# EAGLE board 549-teletouch (EAGLE 8.0.0)
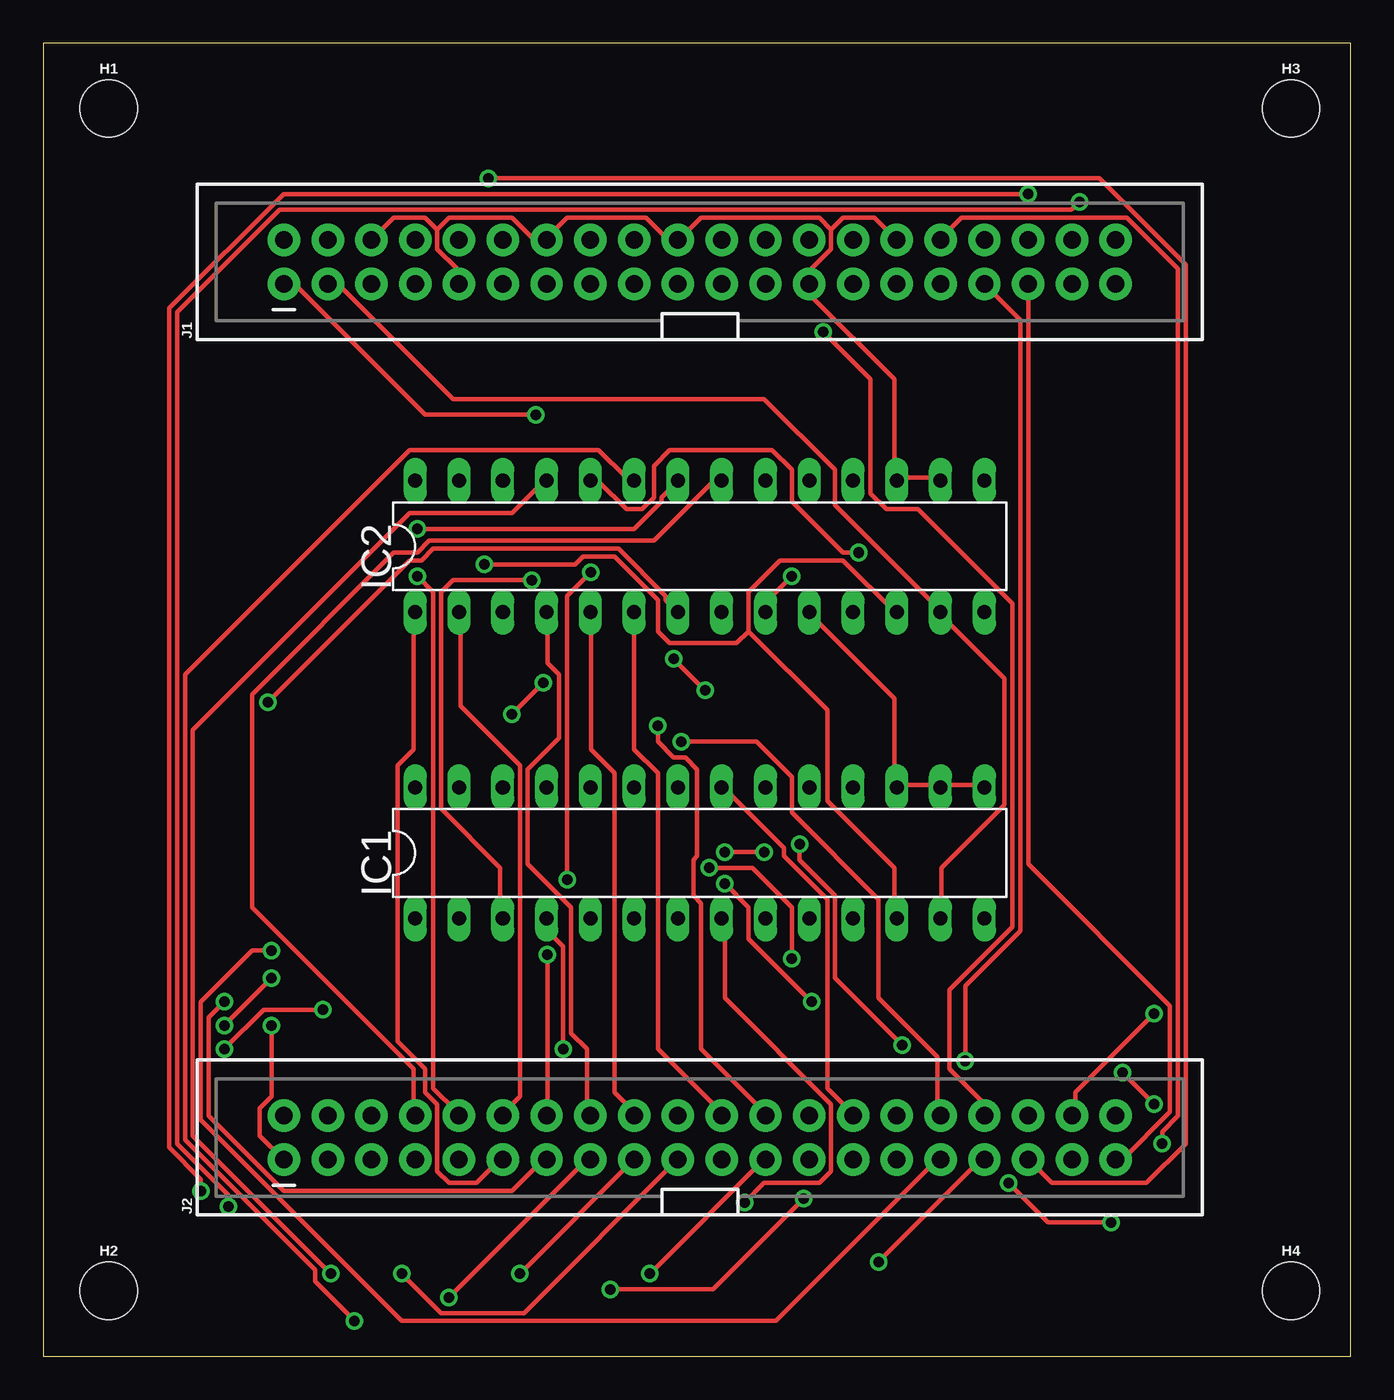
[diagram p0: board, top side]
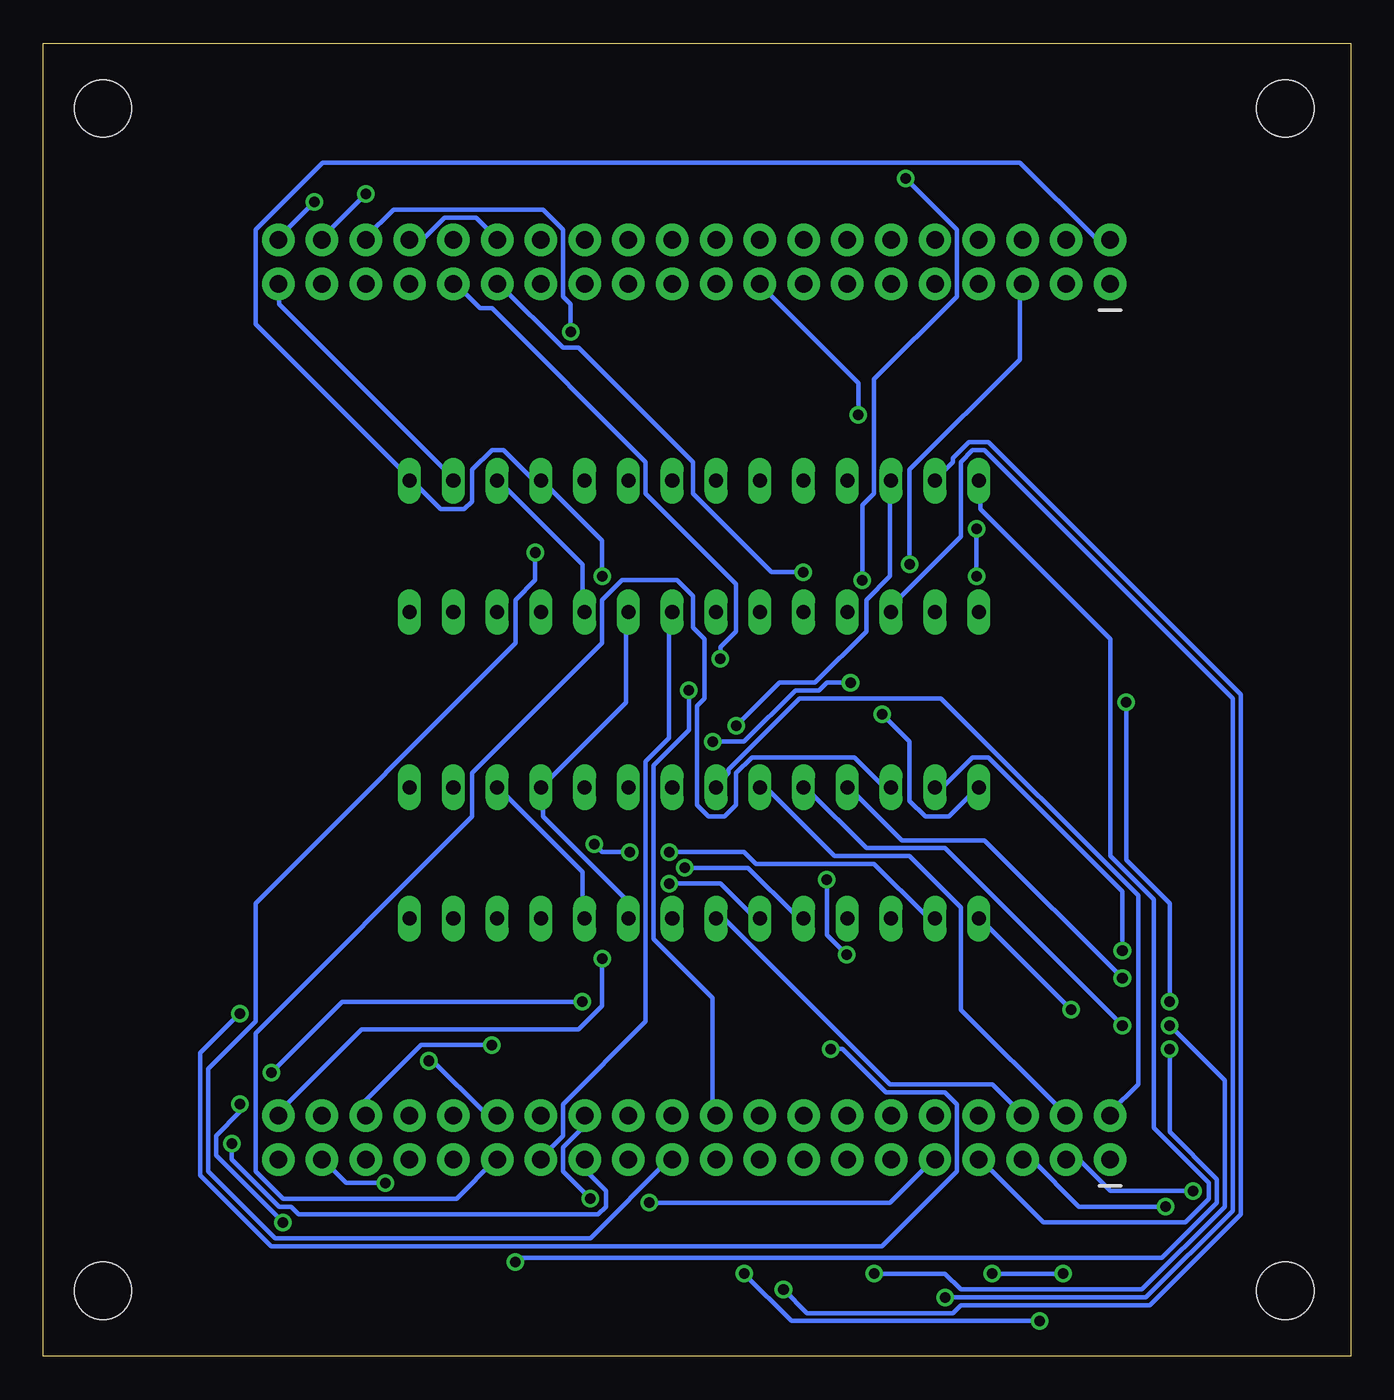
[diagram p1: board, bottom side, seen from below]

Size 75.87 x 76.19 mm. Coordinates in mm from the lower left corner, seen from the top.
Outline: 0,0 75.87,0 75.87,76.19 0,76.19 0,0
Copper layers (1*16): Top 0.035mm / dielectric 1.5mm / Bottom 0.035mm
Design rules "default": minimum track width 10mil, minimum drill 24mil, track to track 8mil, track to pad 8mil, pad to pad 8mil, via to via 8mil, smd to smd 8mil, copper to edge 40mil, drill to drill 8mil, minimum pad ring 10mil, minimum via ring 8mil, stop-mask expansion 4mil, vias tented up to drill 0mil, thermal gap 10mil

## Footprints (pad centres in the part's own frame; a part is rotated, then mirrored left to right if it is on the bottom)
STAND-OFF = hole 3.302: 0,0
DIL28-3 = drill 0.813 long: 1 -16.51,-3.81; 2 -13.97,-3.81; 3 -11.43,-3.81; 4 -8.89,-3.81; 5 -6.35,-3.81; 6 -3.81,-3.81; 7 -1.27,-3.81; 8 1.27,-3.81; 9 3.81,-3.81; 10 6.35,-3.81; 11 8.89,-3.81; 12 11.43,-3.81; 13 13.97,-3.81; 14 16.51,-3.81; 15 16.51,3.81; 16 13.97,3.81; 17 11.43,3.81; 18 8.89,3.81; 19 6.35,3.81; 20 3.81,3.81; 21 1.27,3.81; 22 -1.27,3.81; 23 -3.81,3.81; 24 -6.35,3.81; 25 -8.89,3.81; 26 -11.43,3.81; 27 -13.97,3.81; 28 -16.51,3.81
2X20_SHROUDED = drill 1.016 pad 1.88: 1 -1.27,24.13; 2 1.27,24.13; 3 -1.27,21.59; 4 1.27,21.59; 5 -1.27,19.05; 6 1.27,19.05; 7 -1.27,16.51; 8 1.27,16.51; 9 -1.27,13.97; 10 1.27,13.97; 11 -1.27,11.43; 12 1.27,11.43; 13 -1.27,8.89; 14 1.27,8.89; 15 -1.27,6.35; 16 1.27,6.35; 17 -1.27,3.81; 18 1.27,3.81; 19 -1.27,1.27; 20 1.27,1.27; 21 -1.27,-1.27; 22 1.27,-1.27; 23 -1.27,-3.81; 24 1.27,-3.81; 25 -1.27,-6.35; 26 1.27,-6.35; 27 -1.27,-8.89; 28 1.27,-8.89; 29 -1.27,-11.43; 30 1.27,-11.43; 31 -1.27,-13.97; 32 1.27,-13.97; 33 -1.27,-16.51; 34 1.27,-16.51; 35 -1.27,-19.05; 36 1.27,-19.05; 37 -1.27,-21.59; 38 1.27,-21.59; 39 -1.27,-24.13; 40 1.27,-24.13

## Placement (x,y rotation side)
FRAME1  FRAME-LETTER  [CREATIVE_COMMONS]  -101.6,88.9 0 top  (outside the outline)
H1  STAND-OFF  [STAND-OFF]  3.81,72.39 0 top
H2  STAND-OFF  [STAND-OFF]  3.81,3.81 0 top
H3  STAND-OFF  [STAND-OFF]  72.39,72.39 0 top
H4  STAND-OFF  [STAND-OFF]  72.39,3.81 0 top
IC1  MCP23017SP  [DIL28-3]  38.1,29.21 0 top
IC2  MCP23017SP  [DIL28-3]  38.1,46.99 0 top
J1  RASPBERRYPI-40-PIN-GPIO_PTH  [2X20_SHROUDED]  38.1,63.5 90 top
J2  RASPBERRYPI-40-PIN-GPIO_PTH  [2X20_SHROUDED]  38.1,12.7 90 top

## Library data of the parts
FRAME1 = SparkFun-Aesthetics
H1-H4 = SparkFun-Hardware
IC1 IC2 = microchip; MF: MICROCHIP; MPN: MCP23017-E/SP; OC_FARNELL: 1332088; OC_NEWARK: 31K2959
J1 J2 = SparkFun-Connectors; PROD_ID: CONN-12263; SF_ID: PRT-13054

## Nets
3.3V: J1.1 J1.17
5V: J1.4
GND: IC1.10 IC1.15 IC1.16 IC1.17 IC2.10 IC2.16 IC2.17 J1.6 J1.9 J1.14 J1.20 J1.25 J1.30 J1.34 J1.39
GP1: IC2.21 J2.8
GP2: IC2.22 J2.10
GP3: IC2.23 J2.23
GP4: IC2.24 J2.21
GP5: IC2.25 J2.19
GP6: IC2.26 J2.24
GP7: IC2.27 J2.26
GP8: IC2.28 J2.7
GP9: IC2.1 J2.11
GP10: IC2.2 J2.12
GP11: IC2.3 J2.15
GP12: IC2.4 J2.16
GP13: IC2.5 J2.18
GP14: IC2.6 J2.22
GP15: IC2.7 J2.13
GP16: IC2.8 J2.27
GP17: IC1.21 J2.28
GP18: IC1.22 J2.2
GP19: IC1.23 J2.4
GP20: IC1.24 J2.1
GP21: IC1.25 J2.17
GP22: IC1.26 J2.29
GP23: IC1.27 J2.31
GP24: IC1.28 J2.32
GP25: IC1.1 J2.33
GP26: IC1.2 J2.36
GP27: IC1.3 J2.35
GP28: IC1.4 J2.38
GP29: IC1.5 J2.40
GP30: IC1.6 J2.37
GP31: IC1.7 J2.6
GP32: IC1.8 J2.9
GP33: J1.29 J2.14
GP34: J1.31 J2.20
GP35: J1.32 J2.25
GP36: J1.33 J2.30
GP37: J1.36 J2.34
GP38: J1.35 J2.39
GP39: J1.38 J2.3
GP40: J1.40 J2.5
GP41: J1.37
GP42: J1.7
GP43: J1.11
GP44: J1.12
GP45: J1.15
GP46: J1.16
GP47: J1.18
GP48: J1.22
GP49: J1.13
SCL: IC1.12 IC2.12 J1.5
SDA: IC1.13 IC2.13 J1.3
VDD: IC1.9 IC1.18 IC2.9 IC2.15 IC2.18 J1.2

## Tracks (layer width: path | path; a pad name or v marks a point on that pad's centre or on a via)
3.3V  (via drill 0.61)
  Top 0.254: v28.57,54.63 22.17,54.63 14.63,62.18 14.17,62.18 J1.1
  Bottom 0.254: v28.57,54.63 28.57,56.46 34.29,62.18 J1.17
GND
  Top 0.254: 45.72,65.38 45.72,64.24 44.58,63.09 44.58,62.41 J1.25 44.58,62.18 44.58,61.49 49.38,56.69 49.38,50.98 IC2.17 49.61,50.98 51.89,50.98 IC2.16 | 45.72,65.38 46.41,66.06 48.23,66.06 J1.30 | 22.86,65.38 22.86,64.24 24,63.09 24,62.41 J1.9 | 22.86,65.38 22.17,66.06 20.34,66.06 J1.6 | 22.86,65.38 23.55,66.06 27.2,66.06 28.35,64.92 29.03,64.92 J1.14 29.26,64.92 30.4,66.06 34.98,66.06 36.12,64.92 36.8,64.92 J1.20 37.03,64.92 38.18,66.06 45.03,66.06 45.72,65.38 | IC1.15 54.41,33.15 52.12,33.15 IC1.16 51.89,33.15 49.61,33.15 IC1.17 49.38,33.15 49.38,38.18 44.58,42.98 IC2.10
  Bottom 0.254: J1.34 54.41,64.92 53.72,64.92 52.58,66.06 50.75,66.06 49.61,64.92 J1.30 | IC1.10 44.58,25.6 44.58,28.12 49.38,32.92 IC1.17 | IC2.10 44.58,43.2 44.58,45.95 49.38,50.75 IC2.17 | J1.39 62.18,62.18 62.18,61.04 52.12,50.98 IC2.16
GP1
  Top 0.254: IC2.21 39.32,50.75 38.86,50.75 35.43,47.32 22.4,47.32 21.72,46.63 20.34,46.63 12.12,38.41 12.12,26.06 21.49,16.69 21.49,14.17 J2.8
GP2  (via drill 0.61)
  Top 0.254: v21.72,48.01 34.29,48.01 35.89,49.61 35.89,49.84 36.8,50.75 IC2.22 | v21.72,45.26 22.63,44.35 22.63,15.54 24,14.17 J2.10
  Bottom 0.254: v21.72,45.26 v21.72,48.01
GP3  (via drill 0.61)
  Top 0.254: v18.06,2.06 15.77,4.34 15.77,5.03 8.23,12.57 8.23,39.55 21.26,52.58 32.23,52.58 33.83,50.98 34.29,50.98 IC2.23 | v35.2,4.8 41.83,11.43 J2.23
  Bottom 0.254: v18.06,2.06 32.46,2.06 v35.2,4.8
GP4  (via drill 0.61)
  Top 0.254: v47.32,46.63 46.41,46.63 43.43,49.61 43.43,51.44 42.29,52.58 36.35,52.58 35.43,51.66 35.43,49.84 34.75,49.15 33.83,49.15 32.23,50.75 31.77,50.75 IC2.24
  Bottom 0.254: v47.32,46.63 47.32,45.03 48.46,43.89 48.46,41.38 63.55,26.29 63.55,19.43 66.29,16.69 66.29,10.74 62.41,6.86 44.12,6.86 39.55,11.43 J2.21
GP5  (via drill 0.61)
  Top 0.254: v16.69,4.8 8.69,12.8 8.69,36.35 21.26,48.92 27.2,48.92 29.03,50.75 IC2.25 | v20.8,4.8 23.09,2.52 27.89,2.52 36.8,11.43 J2.19
  Bottom 0.254: v20.8,4.8 v16.69,4.8
GP6  (via drill 0.61)
  Top 0.254: v35.66,36.58 35.66,35.66 36.58,34.75 37.26,34.75 37.95,34.06 37.95,29.03 37.72,28.8 37.72,26.75 38.18,26.29 38.18,17.83 41.83,14.17 J2.24
  Bottom 0.254: v35.66,36.58 33.15,39.09 31.09,39.09 28.12,42.06 28.12,43.89 26.75,45.26 26.75,50.75 IC2.26
GP7  (via drill 0.61)
  Top 0.254: v32.92,3.89 38.86,3.89 v44.12,9.14
  Bottom 0.254: v32.92,3.89 31.55,2.52 23.09,2.52 22.63,2.97 11.66,2.97 6.4,8.23 6.4,38.41 21.03,53.03 22.17,53.03 23.09,52.12 23.09,51.89 24,50.98 IC2.27 | v44.12,9.14 45.72,10.74 45.72,12.12 44.58,13.26 44.58,13.95 J2.26
GP8
  Bottom 0.254: IC2.28 21.49,50.75 21.49,49.15 13.95,41.6 13.95,29.03 11.43,26.52 11.43,13.26 8.23,10.06 8.23,9.14 9.6,7.77 17.83,7.77 21.49,11.43 J2.7
GP9
  Top 0.254: IC2.1 21.49,42.98 21.49,35.2 20.57,34.29 20.57,18.29 22.17,16.69 22.17,15.32 22.86,14.63 22.86,10.74 23.55,10.06 25.15,10.06 26.52,11.43 J2.11
GP10
  Top 0.254: IC2.2 24.23,42.98 24.23,37.72 27.66,34.29 27.66,15.09 26.75,14.17 J2.12
GP11  (via drill 0.61)
  Top 0.254: v23.55,3.43 31.55,11.43 J2.15
  Bottom 0.254: v23.55,3.43 11.89,3.43 6.86,8.46 6.86,38.18 21.26,52.58 21.95,52.58 22.63,51.89 22.63,47.55 26.52,43.66 26.52,43.2 IC2.3
GP12
  Top 0.254: IC2.4 29.26,42.98 29.26,40.23 29.95,39.55 29.95,35.89 28.12,34.06 28.12,28.57 30.63,26.06 30.63,18.75 31.55,17.83 31.55,14.17 J2.16
GP13
  Top 0.254: IC2.5 31.77,42.98 31.77,35.2 33.15,33.83 33.15,15.32 34.29,14.17 J2.18
GP14
  Top 0.254: IC2.6 34.29,35.2 35.66,33.83 35.66,17.83 39.32,14.17 J2.22
GP15  (via drill 0.61)
  Top 0.254: IC2.7 36.12,43.89 36.12,44.12 33.38,46.86 22.63,46.86 21.95,46.18 21.26,46.18 v13.03,37.95 | v10.52,20.57 9.6,19.66 9.6,13.95 13.95,9.6 27.2,9.6 29.03,11.43 J2.13
  Bottom 0.254: v13.03,37.95 13.03,28.8 10.52,26.29 v10.52,20.57
GP16
  Bottom 0.254: IC2.8 39.55,42.98 39.55,35.89 40.92,34.52 40.92,19.43 45.72,14.63 45.72,12.8 47.09,11.43 J2.27
GP17
  Top 0.254: IC1.21 39.55,32.92 42.98,29.49 42.98,29.03 45.49,26.52 45.49,15.54 46.86,14.17 J2.28
GP18
  Bottom 0.254: IC1.22 36.8,33.15 36.12,33.83 36.12,34.06 32,38.18 23.77,38.18 12.34,26.75 12.34,15.77 13.95,14.17 J2.2
GP19
  Bottom 0.254: IC1.23 34.29,32.92 33.83,32.92 29.95,29.03 25.6,29.03 22.63,26.06 22.63,20.12 16.69,14.17 J2.4
GP20  (via drill 0.61)
  Top 0.254: v13.26,19.2 13.26,15.09 12.57,14.4 12.57,12.8 13.95,11.43 J2.1
  Bottom 0.254: v13.26,19.2 23.55,29.49 28.12,29.49 31.55,32.92 IC1.24
GP21  (via drill 0.61)
  Top 0.254: v10.52,19.2 v13.26,21.95 | J2.17 v27.66,4.8
  Bottom 0.254: v13.26,21.95 21.26,29.95 26.06,29.95 29.03,32.92 IC1.25 | v10.52,19.2 7.32,16 7.32,8.69 12.12,3.89 22.63,3.89 23.55,4.8 v27.66,4.8
GP22
  Bottom 0.254: IC1.26 26.75,33.15 27.2,33.15 28.8,34.75 34.75,34.75 35.66,33.83 35.66,32 36.35,31.32 37.26,31.32 37.95,32 37.95,37.72 37.49,38.18 37.49,41.6 38.18,42.29 38.18,44.12 39.09,45.03 42.29,45.03 43.43,43.89 43.43,41.38 50.98,33.83 50.98,31.32 63.55,18.75 63.55,10.74 61.95,9.14 51.89,9.14 49.61,11.43 J2.29
GP23  (via drill 0.61)
  Top 0.254: v13.26,23.55 12.12,23.55 9.14,20.57 9.14,13.72 20.8,2.06 42.52,2.06 51.89,11.43 J2.31
  Bottom 0.254: v13.26,23.55 13.26,26.98 21.03,34.75 21.95,34.75 23.55,33.15 24,33.15 IC1.27
GP24  (via drill 0.61)
  Top 0.254: v29.03,39.09 v27.2,37.26 | v37.03,35.66 41.38,35.66 43.43,33.6 43.43,31.55 48.46,26.52 48.46,20.8 51.89,17.37 51.89,14.17 J2.32
  Bottom 0.254: v27.2,37.26 25.6,35.66 25.6,32.23 24.69,31.32 23.32,31.32 21.72,32.92 IC1.28 | v29.03,39.09 30.4,39.09 30.86,38.63 32.23,38.63 35.2,35.66 v37.03,35.66
GP25  (via drill 0.61)
  Top 0.254: v16.23,20.12 12.8,20.12 v10.52,17.83 | v48.46,5.49 54.41,11.43 J2.33
  Bottom 0.254: v16.23,20.12 21.49,25.38 IC1.1 | v10.52,17.83 10.52,13.03 7.77,10.29 7.77,8.91 10.97,5.71 48.23,5.71 v48.46,5.49
GP26  (via drill 0.61)
  Top 0.254: v41.83,29.26 v39.55,29.26 | v43.89,29.72 43.89,28.8 45.95,26.75 45.95,21.95 v49.84,18.06
  Bottom 0.254: v39.55,29.26 35.2,29.26 34.52,28.57 27.66,28.57 24.69,25.6 24.23,25.6 IC1.2 | v41.83,29.26 43.43,29.26 v43.89,29.72 | v49.84,18.06 53.95,18.06 57.15,14.86 J2.36
GP27  (via drill 0.61)
  Top 0.254: v28.35,45.03 23.77,45.03 23.09,44.35 23.09,31.77 26.52,28.35 26.52,25.6 IC1.3 | v25.83,68.35 61.27,68.35 66.29,63.32 66.29,12.34 64.01,10.06 58.52,10.06 J2.35
  Bottom 0.254: v28.35,45.03 28.35,49.38 27.66,50.06 27.66,56.69 22.86,61.49 22.86,65.38 v25.83,68.35
GP28  (via drill 0.61)
  Top 0.254: v30.18,17.83 30.18,23.77 29.26,24.69 29.26,25.38 IC1.4 | v64.47,19.89 59.89,15.32 59.89,14.17 J2.38
  Bottom 0.254: v30.18,17.83 29.49,17.83 26.98,15.32 23.55,15.32 22.86,14.63 22.86,10.74 27.2,6.4 62.64,6.4 66.75,10.52 66.75,17.6 v64.47,19.89
GP29  (via drill 0.61)
  Top 0.254: v38.63,28.35 41.15,28.35 43.43,26.06 v43.43,23.09
  Bottom 0.254: v38.63,28.35 34.98,28.35 32.23,25.6 31.77,25.6 IC1.5 | v43.43,23.09 43.43,20.34 44.81,18.97 57.38,18.97 62.18,14.17 J2.40
GP30  (via drill 0.61)
  Top 0.254: v39.55,27.43 40.92,26.06 40.92,24.23 v44.58,20.57 | v64.47,14.63 v62.64,16.46 | v61.95,7.77 58.29,7.77 v56.01,10.06
  Bottom 0.254: v39.55,27.43 36.58,27.43 34.75,25.6 34.29,25.6 IC1.6 | v44.58,20.57 58.52,20.57 v62.64,16.46 | v64.47,14.63 64.47,14.17 65.84,12.8 65.84,11.66 v61.95,7.77 | v56.01,10.06 58.29,10.06 59.66,11.43 J2.37
GP31
  Bottom 0.254: IC1.7 36.8,25.38 36.35,25.38 26.75,15.77 20.8,15.77 19.2,14.17 J2.6
GP32  (via drill 0.61)
  Top 0.254: v40.69,8.91 41.83,10.06 45.03,10.06 45.72,10.74 45.72,14.63 39.55,20.8 39.55,25.38 IC1.8
  Bottom 0.254: v40.69,8.91 26.75,8.91 24.23,11.43 J2.9
GP33  (via drill 0.61)
  Top 0.254: v29.26,23.32 29.26,14.17 J2.14 | v30.4,27.66 30.4,44.12 v31.77,45.49
  Bottom 0.254: v29.26,23.32 30.4,24.46 v30.4,27.66 | v31.77,45.49 33.6,45.49 38.18,50.06 38.18,51.89 44.81,58.52 45.72,58.52 49.38,62.18 J1.29
GP34  (via drill 0.61)
  Top 0.254: v36.58,40.46 v38.41,38.63
  Bottom 0.254: v38.41,38.63 38.41,36.35 40.46,34.29 40.46,24.23 37.03,20.8 37.03,14.17 J2.20 | v36.58,40.46 36.58,41.15 35.66,42.06 35.66,44.81 40.92,50.06 40.92,51.89 49.84,60.81 50.52,60.81 51.89,62.18 J1.31
GP35  (via drill 0.61)
  Top 0.254: v64.92,12.34 64.92,13.03 65.84,13.95 65.84,63.09 62.87,66.06 53.26,66.06 52.12,64.92 J1.32
  Bottom 0.254: v64.92,12.34 64.92,11.43 62.18,8.69 61.49,8.69 61.04,8.23 43.66,8.23 43.2,8.69 43.2,9.6 44.35,10.74 44.35,11.43 J2.25
GP36  (via drill 0.61)
  Top 0.254: v53.49,17.14 53.49,21.49 56.69,24.69 56.69,60.12 54.63,62.18 J1.33
  Bottom 0.254: v53.49,17.14 53.26,17.14 50.29,14.17 49.61,14.17 J2.30
GP37  (via drill 0.61)
  Top 0.254: v45.26,59.44 48.01,56.69 48.01,50.06 48.92,49.15 50.75,49.15 56.24,43.66 56.24,24.92 52.58,21.26 52.58,16.69 54.41,14.86 54.41,14.17 J2.34
  Bottom 0.254: v45.26,59.44 45.26,61.04 45.72,61.49 45.72,65.38 46.86,66.52 55.55,66.52 57.15,64.92 J1.36
GP38
  Top 0.254: J1.35 57.15,28.57 65.38,20.34 65.38,14.17 62.64,11.43 J2.39
GP39  (via drill 0.61)
  Top 0.254: v9.14,9.6 9.14,10.29 7.32,12.12 7.32,60.81 13.95,67.44 v57.15,67.44
  Bottom 0.254: J2.3 15.77,11.43 13.95,9.6 v9.14,9.6 | v57.15,67.44 59.66,64.92 J1.38
GP40  (via drill 0.61)
  Top 0.254: v10.74,8.69 10.74,9.37 7.77,12.34 7.77,60.58 13.72,66.52 59.66,66.52 v60.12,66.98
  Bottom 0.254: J2.5 18.52,11.43 15.77,8.69 v10.74,8.69 | v60.12,66.98 62.18,64.92 J1.40
SCL  (via drill 0.61)
  Top 0.254: 40.92,42.06 45.49,37.49 45.49,32.23 49.38,28.35 49.38,25.6 IC1.12 | 40.92,42.06 40.92,44.35 42.75,46.18 46.41,46.18 49.38,43.2 IC2.12 | v25.6,45.95 30.86,45.95 31.32,46.41 33.15,46.41 35.66,43.89 35.66,42.06 36.35,41.38 40.23,41.38 40.92,42.06
  Bottom 0.254: v25.6,45.95 25.6,51.44 19.2,57.84 19.2,62.18 J1.5
SDA
  Top 0.254: IC1.13 52.12,25.6 52.12,28.35 55.78,32 55.78,39.32 52.12,42.98 IC2.13 52.12,43.2 45.95,49.38 45.95,51.44 41.83,55.55 23.77,55.55 17.14,62.18 16.69,62.18 J1.3
VDD  (via drill 0.61)
  Top 0.254: v43.43,45.26 42.06,43.89 42.06,43.2 IC2.9
  Bottom 0.254: IC1.9 42.06,25.6 42.06,26.52 46.86,31.32 46.86,32.92 IC1.18 42.06,37.95 42.06,42.98 IC2.9 | J1.2 14.17,64.92 14.86,64.92 19.2,69.27 59.66,69.27 63.55,65.38 63.55,59.89 54.63,50.98 IC2.15 54.41,50.75 52.81,49.15 51.44,49.15 50.98,49.61 50.98,51.44 49.84,52.58 49.15,52.58 47.55,50.98 47.09,50.98 IC2.18 46.86,50.75 43.43,47.32 v43.43,45.26